# EAGLE board Power_Supply_Circuit_Manual (EAGLE 9.3.0)
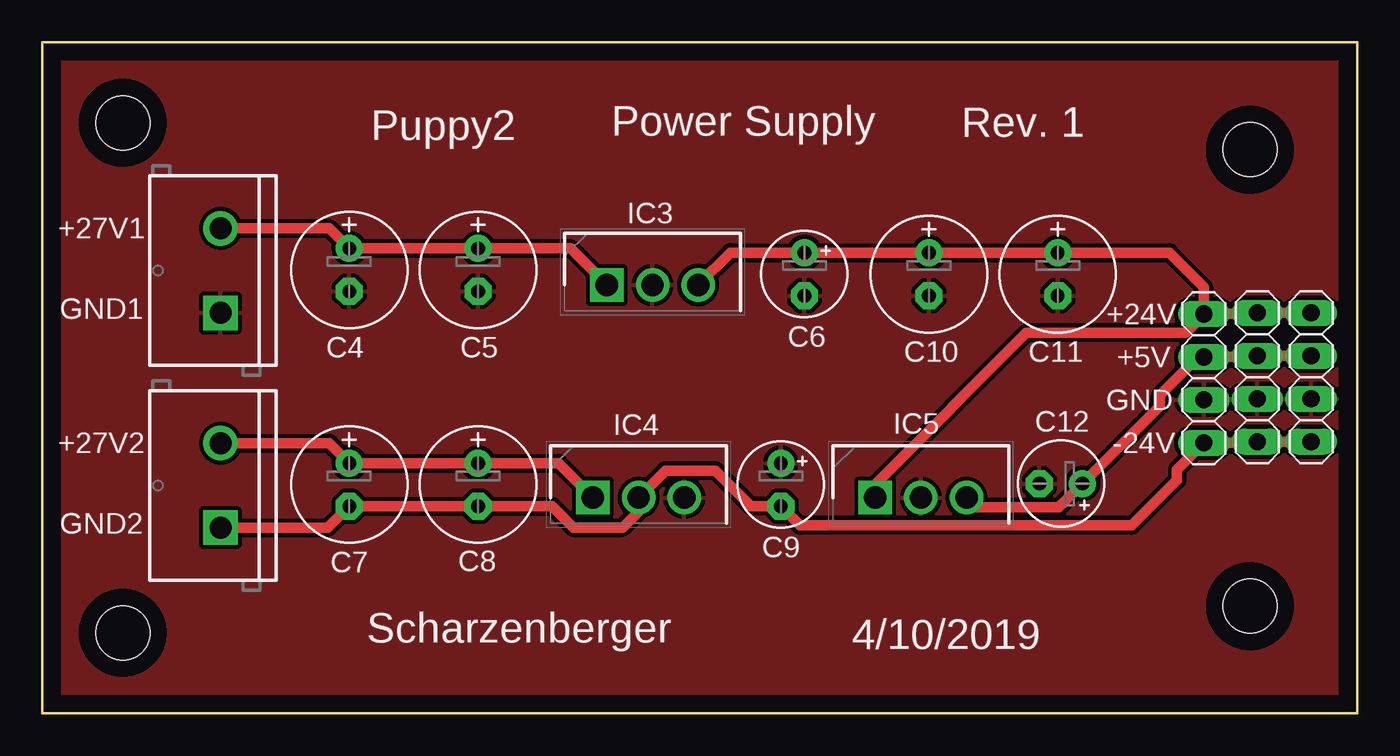
[diagram p0: board, top side]
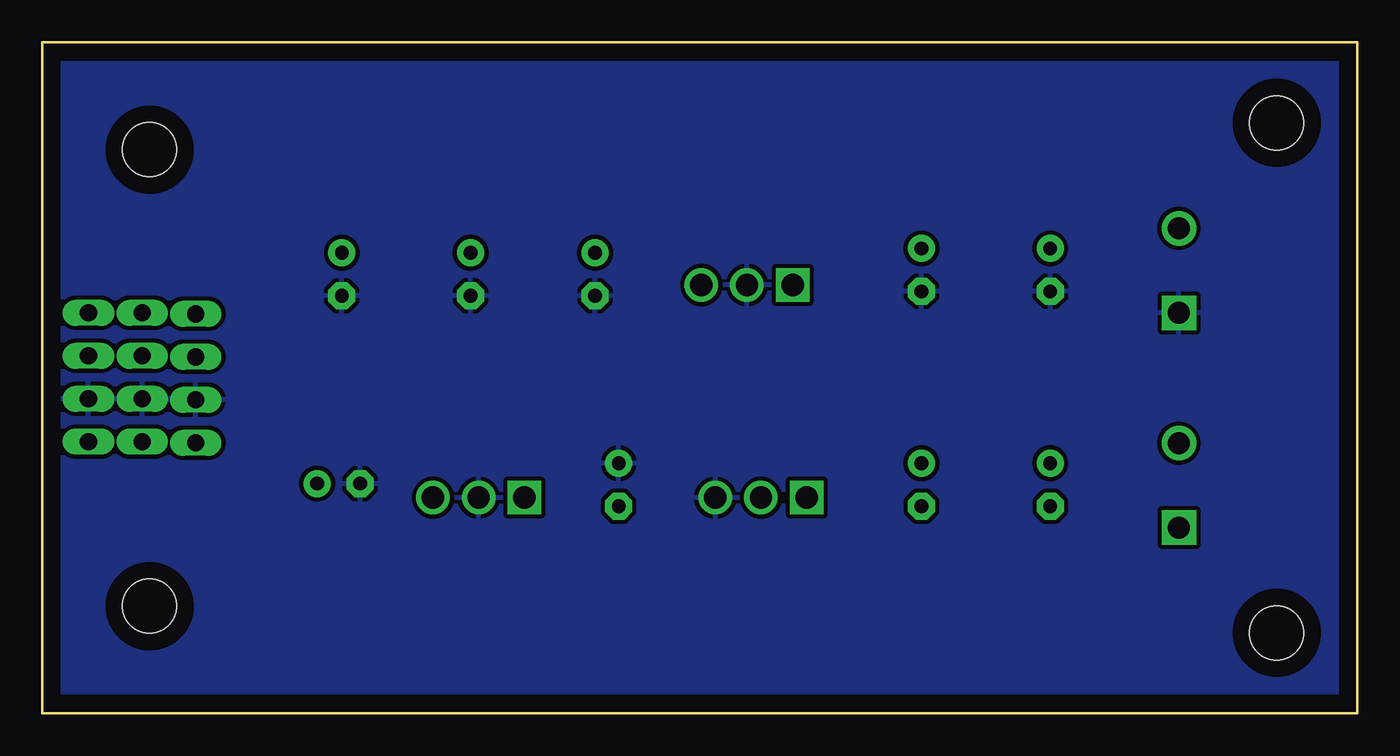
[diagram p1: board, bottom side, seen from below]

Size 77.79 x 39.69 mm. Coordinates in mm from the lower left corner, seen from the top.
Outline: 0,0 77.79,0 77.79,39.69 0,39.69 0,0
Copper layers (1*16): Top 0.035mm / dielectric 1.5mm / Bottom 0.035mm
Design rules "default": minimum track width 6mil, minimum drill 0.35mm, track to track 6mil, track to pad 6mil, pad to pad 6mil, via to via 6mil, smd to smd 6mil, copper to edge 40mil, drill to drill 6mil, minimum pad ring 10mil, minimum via ring 8mil, stop-mask expansion 4mil, vias tented up to drill 0mil, thermal gap 10mil
Net classes: 0 default: width 0.305 mm, drill 0.508 mm, clearance 0.254 mm
Holes 3.17 mm at 4.76,4.76 4.76,34.92 71.44,6.35 71.44,33.34

## Footprints (pad centres in the part's own frame; a part is rotated, then mirrored left to right if it is on the bottom)
E2,5-7 = drill 0.813 pad 1.6: + -1.27,0 | drill 0.813 pad 1.6 octagon: - 1.27,0
E2,5-5 = drill 0.813 pad 1.6: + -1.27,0 | drill 0.813 pad 1.6 octagon: - 1.27,0
TO270P460X1020X2008-3P = drill 1.32 pad 1.98 square: 1 0,0 | drill 1.32 pad 1.98: 2 2.7,0; 3 5.4,0
SCREWTERMINAL-5MM-2 = drill 1.3 pad 2.032 square: 1 0,0 | drill 1.3 pad 2.032: 2 5,0
1X04 = drill 1.016 long: 1 -3.81,0; 2 -1.27,0; 3 1.27,0; 4 3.81,0

## Placement (x,y rotation side)
C4  [E2,5-7]  18.16,26.23 270 top
C5  [E2,5-7]  25.78,26.23 270 top
C6  [E2,5-5]  45.09,25.97 270 top
C7  [E2,5-7]  18.16,13.53 270 top
C8  [E2,5-7]  25.78,13.53 270 top
C9  [E2,5-5]  43.69,13.53 270 top
C10  [E2,5-7]  52.45,25.97 270 top
C11  [E2,5-7]  60.07,25.97 270 top
C12  [E2,5-5]  60.26,13.59 180 top
IC3  L78S24CV  [TO270P460X1020X2008-3P]  33.4,25.34 0 top
IC4  L78S24CV  [TO270P460X1020X2008-3P]  32.58,12.76 0 top
IC5  L7805CV  [TO270P460X1020X2008-3P]  49.28,12.76 0 top
J1  [SCREWTERMINAL-5MM-2]  10.54,23.69 90 top
J2  [SCREWTERMINAL-5MM-2]  10.54,10.99 90 top
JP1  [1X04]  68.71,19.81 270 top
JP2  [1X04]  71.88,19.88 270 top
JP3  [1X04]  75.06,19.88 270 top

## Library data of the parts
C4-C12 = rcl; SPICEPREFIX: C
IC3 IC4 = SamacSys_Parts; DESCRIPTION: L78S24CV, Voltage Regulator, 2A 24 V, 3-Pin TO-220; HEIGHT: 4.6mm; MANUFACTURER_NAME: STMicroelectronics; MANUFACTURER_PART_NUMBER: L78S24CV; MOUSER_PART_NUMBER: 511-L78S24CV
IC5 = SamacSys_Parts; DESCRIPTION: Linear voltage regulator,L7805CV 5V 1.5A STMicroelectronics L7805CV, Single Linear Voltage Regulator, 1.5A 5 V, 3-Pin TO-220; HEIGHT: 4.6mm; MANUFACTURER_NAME: STMicroelectronics; MANUFACTURER_PART_NUMBER: L7805CV; MOUSER_PART_NUMBER: 511-L7805CV
J1 J2 = SparkFun-Connectors; SF_SKU: PRT-08432
JP1-JP3 = pinhead

## Nets
+5V: C12.+ IC5.3 JP1.2 JP2.2 JP3.2
+24V: C6.+ C10.+ C11.+ IC3.3 IC5.1 JP1.1 JP2.1 JP3.1
-24V: C7.- C8.- C9.- IC4.2 J2.1 JP1.4 JP2.4 JP3.4
GND: C4.- C5.- C6.- C9.+ C10.- C11.- C12.- IC3.2 IC4.3 IC5.2 J1.1 JP1.3 JP2.3 JP3.3
SUPPLY1_24V: C4.+ C5.+ IC3.1 J1.2
SUPPLY2_24V: C7.+ C8.+ IC4.1 J2.2

## Tracks (layer width: path | path; a pad name or v marks a point on that pad's centre or on a via)
+5V
  Top 0.305: 71.82,21.08 JP2.2
  Top 0.61: IC5.3 55.25,12.19 60.13,12.19 C12.+ 66.12,18.17 66.12,18.81 68.39,21.08 JP1.2 71.82,21.08 | JP2.2 JP3.2
+24V
  Top 0.305: 71.82,23.62 JP2.1
  Top 0.61: IC3.3 40.71,27.24 C6.+ C10.+ C11.+ 66.67,27.24 68.71,25.21 JP1.1 | IC5.1 49.28,13.56 58.22,22.5 67.65,22.5 68.71,23.56 JP1.1 | JP1.1 71.82,23.62 | JP2.1 JP3.1
-24V
  Top 0.305: 71.82,16 JP2.4
  Top 0.61: J2.1 16.89,10.99 C7.- C8.- 30.15,12.26 31.42,10.99 34.32,10.99 35.28,11.94 IC4.2 36.86,14.35 39.81,14.35 41.91,12.26 C9.- 44.83,11.11 64.44,11.11 67.12,13.79 67.12,14.41 JP1.4 71.82,16 | JP2.4 JP3.4
GND
  pour Top: -1.27,41.27 -1.27,-1.27 79.38,-1.27 79.38,41.27
  pour Bottom: -1.27,41.27 -1.27,-1.27 79.44,-1.27 79.44,41.27
SUPPLY1_24V
  Top 0.61: J1.2 16.97,28.69 C4.+ C5.+ 31.24,27.5 IC3.1
SUPPLY2_24V
  Top 0.61: J2.2 16.97,15.99 C7.+ C8.+ 30.54,14.8 IC4.1

## Text on the board
tPlace: Puppy2 | Power Supply | Rev. 1 | +27V1 | GND1 | +24V | +5V | GND | +27V2 | -24V | GND2 | Scharzenberger | 4/10/2019